# EAGLE board tqfp48_0.5_usb_big (EAGLE 5.07)
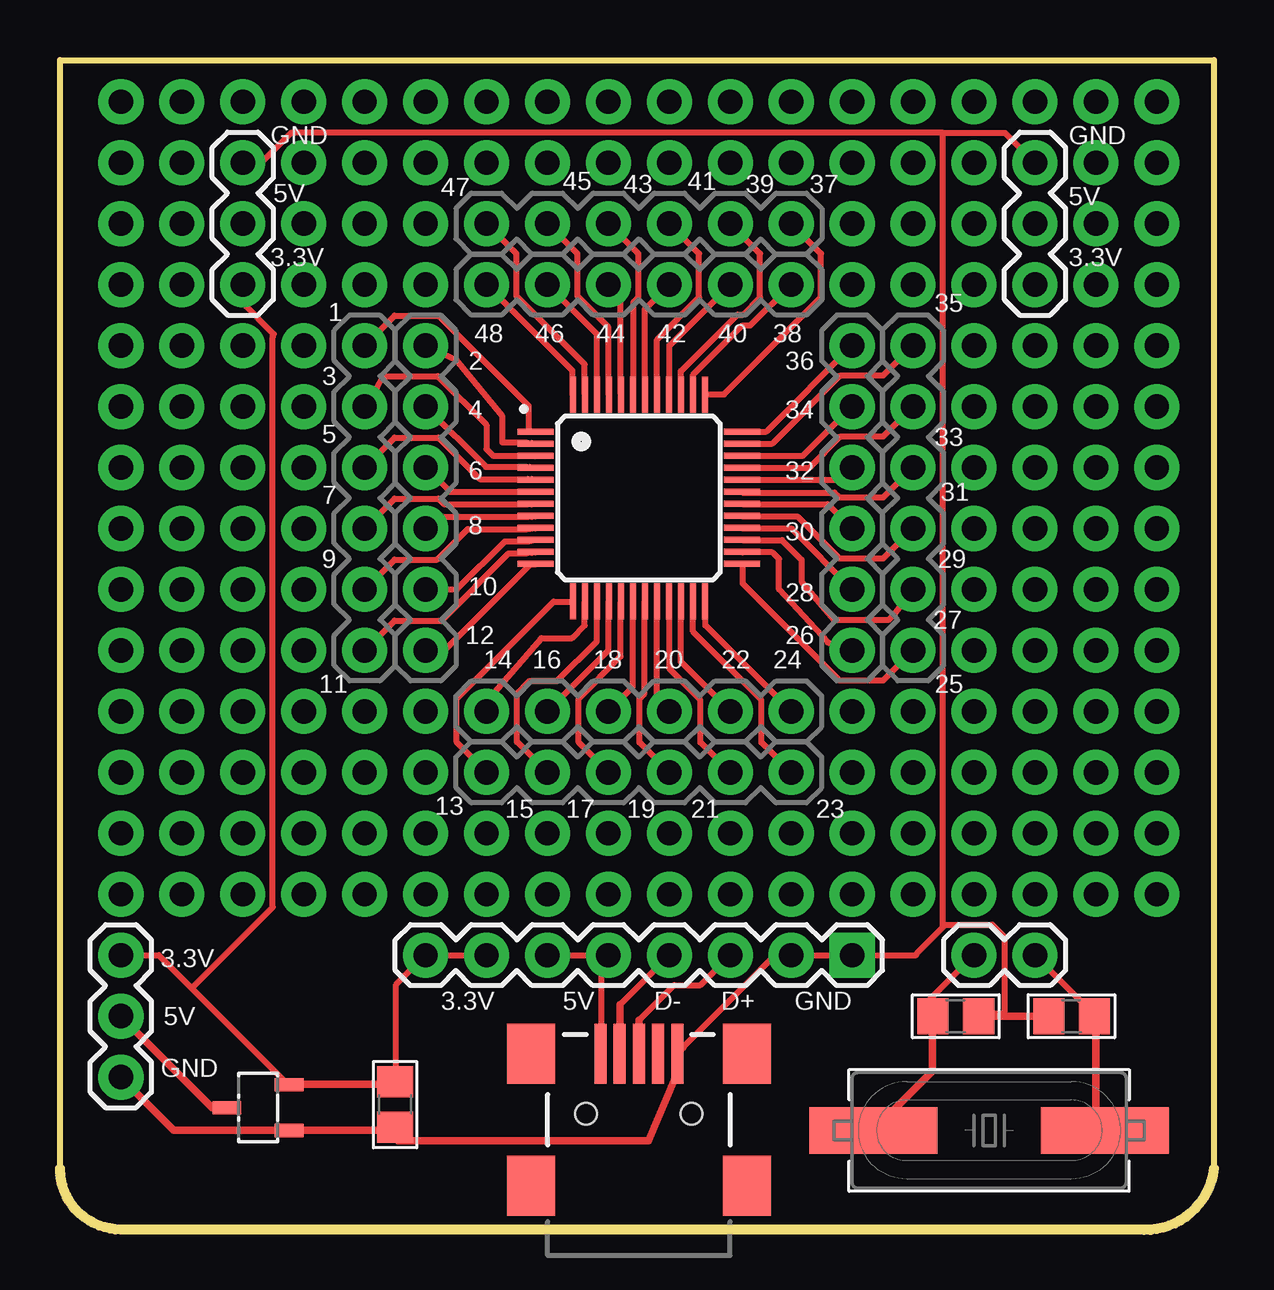
[diagram p0: board, top side]
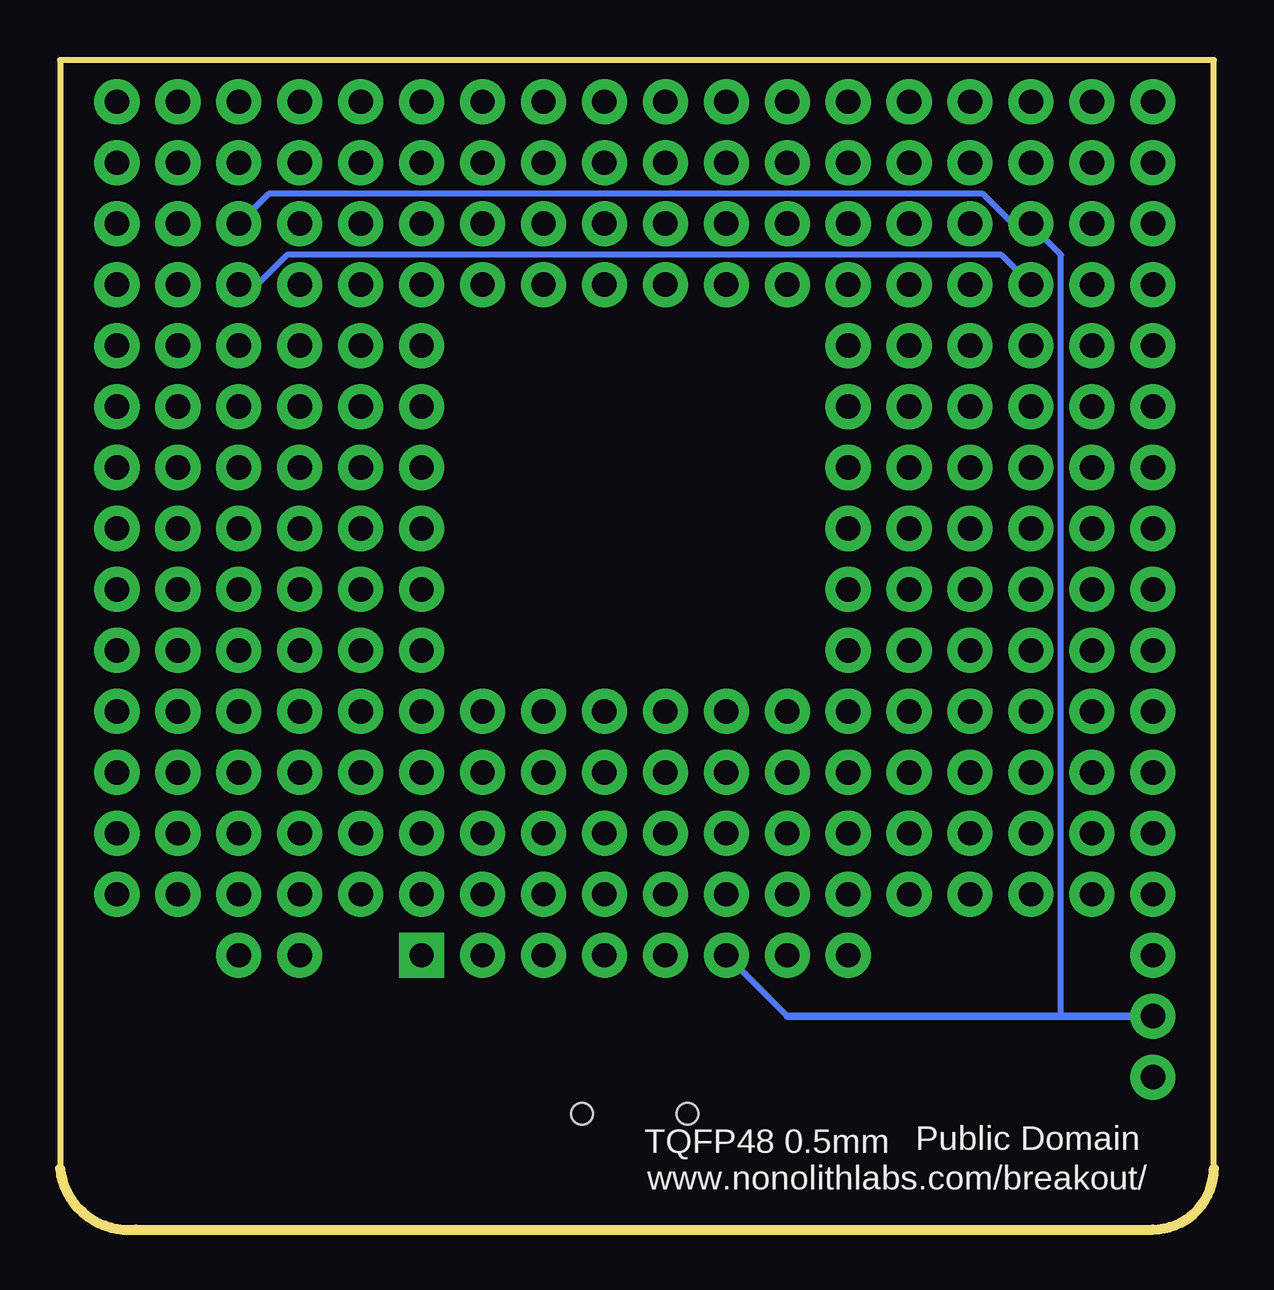
[diagram p1: board, bottom side, seen from below]

Size 48.09 x 48.75 mm. Coordinates in mm from the lower left corner, seen from the top.
Outline: 48.09,48.75 48.09,2.56 arc-90 44.92,0.02 2.54,0.02 arc-90 0,2.56 0,48.75 48.09,48.75
Copper layers (1*16): Top 0.035mm / dielectric 1.5mm / Bottom 0.035mm
Design rules "Fusion_eagle_rule_v1.1": minimum track width 6mil, minimum drill 12mil, track to track 6mil, track to pad 6mil, pad to pad 6mil, via to via 6mil, smd to smd 0mil, copper to edge 10mil, drill to drill 10mil, minimum pad ring 10mil, minimum via ring 6mil, stop-mask expansion 2mil, vias tented up to drill 100mil, thermal gap 10mil
Net classes: 0 default: width 0.254 mm, clearance 0.102 mm

## Footprints (pad centres in the part's own frame; a part is rotated, then mirrored left to right if it is on the bottom)
USB-MINIB = smd 2.5 x 0.5: D+ 2.5,0; D- 2.5,0.8; GND 2.5,-1.6; ID 2.5,-0.8; VBUS 2.5,1.6 | smd 2.5 x 2: MTN1 -3,4.5; MTN2 2.5,4.5; MTN3 -3,-4.5; MTN4 2.5,-4.5 | hole 0.9: 0,2.2; 0,-2.2
0805 = smd 1.3 x 1.5: 1 -0.95,0; 2 0.95,0
LQFP48 = smd 1.5 x 0.25: 1 -4.3,2.75; 2 -4.3,2.25; 3 -4.3,1.75; 4 -4.3,1.25; 5 -4.3,0.75; 6 -4.3,0.25; 7 -4.3,-0.25; 8 -4.3,-0.75; 9 -4.3,-1.25; 10 -4.3,-1.75; 11 -4.3,-2.25; 12 -4.3,-2.75; 25 4.3,-2.75; 26 4.3,-2.25; 27 4.3,-1.75; 28 4.3,-1.25; 29 4.3,-0.75; 30 4.3,-0.25; 31 4.3,0.25; 32 4.3,0.75; 33 4.3,1.25; 34 4.3,1.75; 35 4.3,2.25; 36 4.3,2.75 | smd 0.25 x 1.5: 13 -2.75,-4.3; 14 -2.25,-4.3; 15 -1.75,-4.3; 16 -1.25,-4.3; 17 -0.75,-4.3; 18 -0.25,-4.3; 19 0.25,-4.3; 20 0.75,-4.3; 21 1.25,-4.3; 22 1.75,-4.3; 23 2.25,-4.3; 24 2.75,-4.3; 37 2.75,4.3; 38 2.25,4.3; 39 1.75,4.3; 40 1.25,4.3; 41 0.75,4.3; 42 0.25,4.3; 43 -0.25,4.3; 44 -0.75,4.3; 45 -1.25,4.3; 46 -1.75,4.3; 47 -2.25,4.3; 48 -2.75,4.3
HC49UP = smd 5.334 x 1.93: 1 -4.826,0; 2 4.826,0
1X06-KIT = drill 1.016 pad 1.88 round: 1 0,0; 2 2.54,0; 3 5.08,0; 4 7.62,0; 5 10.16,0; 6 12.7,0
2X10_NOSILK = drill 1.016 pad 1.88 round: 1 -11.43,-1.27; 2 -11.43,1.27; 3 -8.89,-1.27; 4 -8.89,1.27; 5 -6.35,-1.27; 6 -6.35,1.27; 7 -3.81,-1.27; 8 -3.81,1.27; 9 -1.27,-1.27; 10 -1.27,1.27; 11 1.27,-1.27; 12 1.27,1.27; 13 3.81,-1.27; 14 3.81,1.27; 15 6.35,-1.27; 16 6.35,1.27; 17 8.89,-1.27; 18 8.89,1.27; 19 11.43,-1.27; 20 11.43,1.27
1X03 = drill 1.016 pad 1.88 round: 1 0,0; 2 2.54,0; 3 5.08,0
1X02_NO_SILK = drill 1.016 pad 1.88 round: 1 0,0; 2 2.54,0
1X08 = drill 1.016 pad 1.88 square: 1 0,0 | drill 1.016 pad 1.88 round: 2 2.54,0; 3 5.08,0; 4 7.62,0; 5 10.16,0; 6 12.7,0; 7 15.24,0; 8 17.78,0
SOT23-3 = smd 0.55 x 1.2: 01 0.95,1.3; 02 -0.95,1.3; 03 0,-1.3
1X02 = drill 1.016 pad 1.88 round: 1 0,0; 2 2.54,0
1X03_NO_SILK = drill 1.016 pad 1.88 round: 1 0,0; 2 2.54,0; 3 5.08,0

## Placement (x,y rotation side)
E$1  [USB-MINIB]  24.13,4.84 90 top
E$2  [0805]  13.97,5.22 90 top
E$3  [LQFP48]  24.13,30.5 0 top
E$4  [HC49UP]  38.73,4.15 180 top
E$5  [1X06-KIT]  17.78,39.39 0 top
E$6  [1X06-KIT]  12.7,36.85 270 top
E$7  [1X06-KIT]  30.48,21.61 180 top
E$8  [1X06-KIT]  33.02,36.85 270 top
E$9  [1X06-KIT]  15.24,36.85 270 top
E$10  [1X06-KIT]  30.48,19.07 180 top
E$11  [1X06-KIT]  35.56,36.85 270 top
E$12  [2X10_NOSILK]  24.13,45.74 0 top
E$13  [1X06-KIT]  17.78,41.93 0 top
E$14  [1X03]  7.62,39.39 90 top
E$15  [1X02_NO_SILK]  33.02,41.93 0 top
E$16  [1X08]  33.02,11.45 180 top
E$17  [1X02_NO_SILK]  33.02,21.61 0 top
E$18  [1X02_NO_SILK]  33.02,39.39 0 top
E$19  [1X02_NO_SILK]  12.7,41.93 0 top
E$20  [1X02_NO_SILK]  12.7,39.39 0 top
E$23  [1X02_NO_SILK]  12.7,21.61 0 top
E$24  [1X02_NO_SILK]  12.7,19.07 0 top
E$26  [SOT23-3]  8.26,5.1 270 top
E$27  [0805]  42.16,8.91 180 top
E$28  [0805]  37.34,8.91 180 top
E$29  [1X02]  38.1,11.45 0 top
E$30  [1X03]  40.64,39.39 90 top
E$32  [2X10_NOSILK]  8.89,25.42 90 top
E$33  [2X10_NOSILK]  24.13,15.26 0 top
E$34  [2X10_NOSILK]  44.45,33.04 90 top
E$35  [2X10_NOSILK]  3.81,35.58 90 top
E$37  [1X03_NO_SILK]  10.16,39.39 90 top
E$39  [1X02_NO_SILK]  7.62,47.01 0 top
E$40  [2X10_NOSILK]  39.37,25.42 90 top
E$41  [1X03_NO_SILK]  38.1,39.39 90 top
E$42  [1X02_NO_SILK]  38.1,47.01 0 top
E$43  [1X02_NO_SILK]  43.18,47.01 0 top
E$44  [1X02_NO_SILK]  2.54,21.61 0 top
E$45  [1X02_NO_SILK]  2.54,19.07 0 top
E$50  [1X02_NO_SILK]  2.54,16.53 0 top
E$51  [1X02_NO_SILK]  2.54,13.99 0 top
E$52  [1X02_NO_SILK]  43.18,19.07 0 top
E$53  [1X02_NO_SILK]  43.18,16.53 0 top
E$54  [1X02_NO_SILK]  43.18,13.99 0 top
E$55  [1X02_NO_SILK]  33.02,19.07 0 top
E$56  [1X03]  2.54,6.37 90 top

## Library data of the parts
E$1 E$5-E$20 E$23 E$24 E$29 E$30 E$32-E$35 E$37 E$39-E$45 E$50-E$56 = SparkFun
E$2-E$4 E$26-E$28 = nonolith

## Nets
S$1: E$3.47 E$13.1
S$2: E$1.D+ E$16.3
S$3: E$1.D- E$16.4
S$4: E$1.VBUS E$14.2 E$16.5 E$16.6 E$26.03 E$30.2 E$56.2
S$5: E$1.GND E$2.1 E$14.3 E$16.1 E$16.2 E$26.01 E$27.2 E$28.1 E$30.3 E$56.1
S$6: E$4.1 E$27.1 E$29.2
S$7: E$4.2 E$28.2 E$29.1
S$8: E$3.14 E$7.6
S$9: E$3.45 E$13.2
S$10: E$3.3 E$6.2
S$11: E$3.43 E$13.3
S$12: E$3.4 E$9.2
S$13: E$3.41 E$13.4
S$14: E$3.5 E$6.3
S$15: E$3.39 E$13.5
S$16: E$3.6 E$9.3
S$17: E$3.37 E$13.6
S$18: E$3.35 E$11.1
S$19: E$3.16 E$7.5
S$20: E$3.33 E$11.2
S$21: E$3.8 E$9.4
S$22: E$3.31 E$11.3
S$23: E$3.10 E$9.5
S$24: E$3.29 E$11.4
S$25: E$3.18 E$7.4
S$26: E$3.27 E$11.5
S$27: E$3.12 E$9.6
S$28: E$3.25 E$11.6
S$29: E$3.23 E$10.1
S$30: E$3.1 E$6.1
S$31: E$3.21 E$10.2
S$32: E$3.2 E$9.1
S$33: E$3.19 E$10.3
S$34: E$3.20 E$7.3
S$35: E$3.17 E$10.4
S$36: E$3.22 E$7.2
S$37: E$3.15 E$10.5
S$38: E$3.24 E$7.1
S$39: E$3.13 E$10.6
S$40: E$3.7 E$6.4
S$41: E$3.26 E$8.6
S$42: E$3.28 E$8.5
S$43: E$3.9 E$6.5
S$44: E$3.11 E$6.6
S$45: E$3.30 E$8.4
S$46: E$3.32 E$8.3
S$47: E$3.34 E$8.2
S$48: E$3.36 E$8.1
S$49: E$3.38 E$5.6
S$50: E$3.40 E$5.5
S$51: E$2.2 E$14.1 E$16.7 E$16.8 E$26.02 E$30.1 E$56.3
S$52: E$3.42 E$5.4
S$53: E$3.44 E$5.3
S$54: E$3.46 E$5.2
S$55: E$3.48 E$5.1

## Tracks (layer width: path | path; a pad name or v marks a point on that pad's centre or on a via)
S$1
  Top 0.254: E$13.1 19.02,40.68 19.02,38.9 21.87,36.06 21.87,34.82 E$3.47
S$2
  Top 0.254: 24.13,8.73 25.6,10.2 26.7,10.2 E$16.3
  Top 0.305: E$1.D+ 24.13,8.73
S$3
  Top 0.254: 23.34,9.39 E$16.4
  Top 0.305: 23.34,9.39 23.34,7.61 E$1.D-
S$4
  Top 0.254: 22.55,7.61 22.55,11.14 E$16.5 E$16.6
  Top 0.305: E$56.2 6.35,5.1 E$26.03 | 22.55,7.61 E$1.VBUS
  Bottom 0.254: E$30.2 39.4,43.17 9.63,43.17 8.38,41.93 E$14.2 7.54,41.8 6.38,40.63 6.38,8.91 | 17.78,8.91 E$16.6
  Bottom 0.305: 17.78,8.91 6.38,8.91 E$56.2
S$5
  Top 0.254: E$14.3 8.38,44.47 9.63,45.71 36.8,45.71 | 36.8,45.71 39.4,45.71 E$30.3 | 25.96,7.61 29.79,11.45 E$16.2 E$16.1 35.69,11.45 35.76,11.57 36.8,12.62 | 36.8,12.62 36.8,45.71 | 39.37,8.98 39.37,12.21 38.86,12.72 36.91,12.72 36.8,12.62
  Top 0.305: E$56.1 4.75,4.16 9.4,4.16 E$26.01 9.58,4.16 13.87,4.16 13.97,4.26 E$2.1 14.1,3.73 24.54,3.73 25.65,6.37 25.65,7.46 E$1.GND 25.73,7.61 25.96,7.61 | E$27.2 E$28.1 38.15,8.98 39.37,8.98
S$6
  Top 0.254: 43.1,8.98 E$29.2
  Top 0.305: 43.1,8.98 E$27.1 43.18,8.78 43.18,4.51 43.54,4.16 E$4.1
S$7
  Top 0.254: 36.07,9.42 E$29.1
  Top 0.305: E$4.2 36.37,6.62 36.37,8.91 E$28.2 36.3,9.03 36.14,9.19 36.14,9.34 36.07,9.42
S$8
  Top 0.254: E$7.6 17.86,22.12 20.07,24.66 21.34,24.66 21.87,25.19 21.87,26.18 E$3.14
S$9
  Top 0.254: E$13.2 21.57,40.68 21.57,38.9 22.86,37.61 22.86,34.82 E$3.45
S$10
  Top 0.254: 19.81,32.25 E$3.3 19.66,32.25 18.06,32.25 17.78,32.53 17.78,33.55 15.75,35.58 13.46,35.58 13.21,35.07 E$6.2
S$11
  Top 0.254: E$13.3 24.11,40.68 24.11,38.85 23.9,38.65 23.9,34.82 E$3.43
S$12
  Top 0.254: E$3.4 19.81,31.77 | 19.58,31.79 19.61,31.77 19.66,31.77 E$3.4 | E$9.2 17.75,31.79 19.46,31.79 E$3.4
S$13
  Top 0.254: E$13.4 26.64,40.68 26.64,38.85 24.89,37.1 24.89,34.82 E$3.41
S$14
  Top 0.254: E$3.5 19.81,31.26 | E$3.5 19.66,31.28 | E$6.3 13.95,33.01 15.77,33.01 17.5,31.28 19.51,31.28 E$3.5
S$15
  Top 0.254: E$13.5 29.18,40.68 29.18,38.85 28.47,38.14 28.25,38.14 25.88,35.78 25.88,34.82 E$3.39
S$16
  Top 0.254: E$3.6 19.81,30.75 | E$3.6 19.66,30.75 | E$9.3 16.26,30.75 19.51,30.75 E$3.6
S$17
  Top 0.254: E$13.6 31.73,40.68 31.73,38.85 27.69,34.82 26.9,34.82 E$3.37
S$18
  Top 0.254: E$11.1 34.31,35.6 32.54,35.6 29.69,32.76 28.45,32.76 E$3.35
S$19
  Top 0.254: E$7.5 22.86,24.15 22.86,26.18 E$3.16
S$20
  Top 0.254: E$11.2 34.31,33.06 32.54,33.06 31.24,31.77 28.45,31.77 E$3.33
S$21
  Top 0.254: E$3.8 19.81,29.74 | E$3.8 19.66,29.71 | E$9.4 15.72,29.71 19.51,29.71 E$3.8
S$22
  Top 0.254: E$11.3 34.31,30.52 32.49,30.52 32.28,30.73 28.45,30.73 E$3.31
S$23
  Top 0.254: E$3.10 19.81,28.74 | E$3.10 19.66,28.74 | E$9.5 16.54,26.69 18.54,28.69 19.53,28.69 E$3.10
S$24
  Top 0.254: E$11.4 34.31,27.98 32.49,27.98 30.73,29.74 28.45,29.74 E$3.29
S$25
  Top 0.254: E$7.4 23.88,22.62 23.88,26.18 E$3.18
S$26
  Top 0.254: E$3.27 28.45,28.74 30.1,28.74 30.91,27.93 30.91,27.02 32.26,25.42 34.54,25.42 34.8,25.67 E$11.5
S$27
  Top 0.254: E$9.6 16.03,24.15 19.61,27.73 19.81,27.73 E$3.12
S$28
  Top 0.254: E$11.6 34.31,22.9 32.49,22.9 28.45,26.94 28.45,27.73 E$3.25
S$29
  Top 0.254: E$10.1 29.23,20.31 29.23,22.09 26.39,24.93 26.39,26.18 E$3.23
S$30
  Top 0.254: E$3.1 19.81,33.27 19.61,33.27 19.53,33.39 19.53,34.33 15.77,38.09 13.95,38.09 E$6.1
S$31
  Top 0.254: E$10.2 26.7,20.31 26.7,22.09 25.4,23.39 25.4,26.18 E$3.21
S$32
  Top 0.254: E$3.2 19.81,32.76 | E$3.2 19.66,32.78 | E$9.1 16.51,36.26 17.27,35.32 18.44,33.9 18.44,32.81 19.43,32.81 19.46,32.78 19.51,32.78 E$3.2
S$33
  Top 0.254: E$10.3 24.16,20.31 24.16,22.14 24.36,22.34 24.36,26.18 E$3.19
S$34
  Top 0.254: E$7.3 24.89,22.12 24.89,26.18 E$3.20
S$35
  Top 0.254: E$10.4 21.61,20.31 21.61,22.14 23.37,23.89 23.37,26.18 E$3.17
S$36
  Top 0.254: E$7.2 25.88,23.66 25.88,26.18 E$3.22
S$37
  Top 0.254: E$3.15 22.38,26.18 22.38,24.53 20.73,22.88 19.56,22.88 19.05,22.37 19.05,20.34 E$10.5
S$38
  Top 0.254: E$7.1 26.9,25.19 26.9,26.18 E$3.24
S$39
  Top 0.254: E$10.6 16.54,20.31 16.54,22.14 20.57,26.18 21.36,26.18 E$3.13
S$40
  Top 0.254: E$3.7 19.81,30.27 | E$3.7 19.66,30.22 | E$6.4 13.95,30.47 15.77,30.47 16,30.24 19.51,30.24 E$3.7
S$41
  Top 0.254: E$8.6 32,24.48 29.97,26.69 29.97,27.96 29.69,28.24 28.45,28.24 E$3.26
S$42
  Top 0.254: E$8.5 30.48,29.23 28.45,29.23 E$3.28
S$43
  Top 0.254: E$3.9 19.81,29.23 | 19.58,29.2 19.61,29.23 19.66,29.23 E$3.9 | E$6.5 13.95,27.93 15.72,27.93 16.99,29.2 19.46,29.2 E$3.9
S$44
  Top 0.254: E$3.11 19.81,28.24 | E$3.11 19.66,28.21 | E$6.6 13.95,25.39 15.9,25.39 18.69,28.19 19.43,28.19 19.46,28.21 19.51,28.21 E$3.11
S$45
  Top 0.254: E$8.4 32,30.24 28.45,30.24 E$3.30
S$46
  Top 0.254: E$8.3 32.51,31.26 28.45,31.26 E$3.32
S$47
  Top 0.254: E$8.2 30.96,32.25 28.45,32.25 E$3.34
S$48
  Top 0.254: E$8.1 29.44,33.27 28.45,33.27 E$3.36
S$49
  Top 0.254: E$5.6 28.78,37.69 28.45,37.69 26.39,35.63 26.39,34.82 E$3.38
S$50
  Top 0.254: E$5.5 25.4,36.85 25.4,34.82 E$3.40
S$51
  Top 0.254: E$14.1 7.62,38.63 8.91,37.33 8.87,37.2 8.87,13.45 5.49,10.08 | 14.02,6.32 14.02,10.23 E$16.8 E$16.7 | E$56.3 4.12,11.45 5.49,10.08 | 5.49,10.08 9.42,6.14
  Top 0.305: 14.02,6.32 E$2.2 13.97,6.16 13.87,6.06 9.58,6.06 E$26.02 9.42,6.14
  Bottom 0.254: E$30.1 39.88,39.39 38.63,40.63 8.87,40.63 E$14.1
S$52
  Top 0.254: E$5.4 24.38,38.37 24.38,34.82 E$3.42
S$53
  Top 0.254: E$5.3 23.37,38.88 23.37,34.82 E$3.44
S$54
  Top 0.254: E$5.2 22.38,37.33 22.38,34.82 E$3.46
S$55
  Top 0.254: E$5.1 21.36,35.81 21.36,34.82 E$3.48

## Text on the board
tNames: GND | GND | 5V | 47 | 45 | 43 | 41 | 39 | 37 | 5V | 3.3V | 3.3V | 1 | 35 | 48 | 46 | 44 | 42 | 40 | 38 | 2 | 36 | 3 | 4 | 34 | 5 | 33 | 6 | 32 | 7 | 31 | 8 | 30 | 9 | 29 | 10 | 28 | 27 | 12 | 26 | 14 | 16 | 18 | 20 | 22 | 24 | 11 | 25 | 13 | 15 | 17 | 19 | 21 | 23 | 3.3V | 5V | 3.3V | 5V | D- | D+ | GND | GND
bNames: Public Domain | TQFP48 0.5mm | www.nonolithlabs.com/breakout/